# Altium PCB pi_power_pcb.PcbDoc
Units mm, origin at the board's own origin, x right, y up, seen from the top; angles counter-clockwise.
Board outline 83.67 x 56.06 mm, 2 copper layers (Top Layer, GND pour); 18 components, 15 nets, 67 pads, 7 vias.
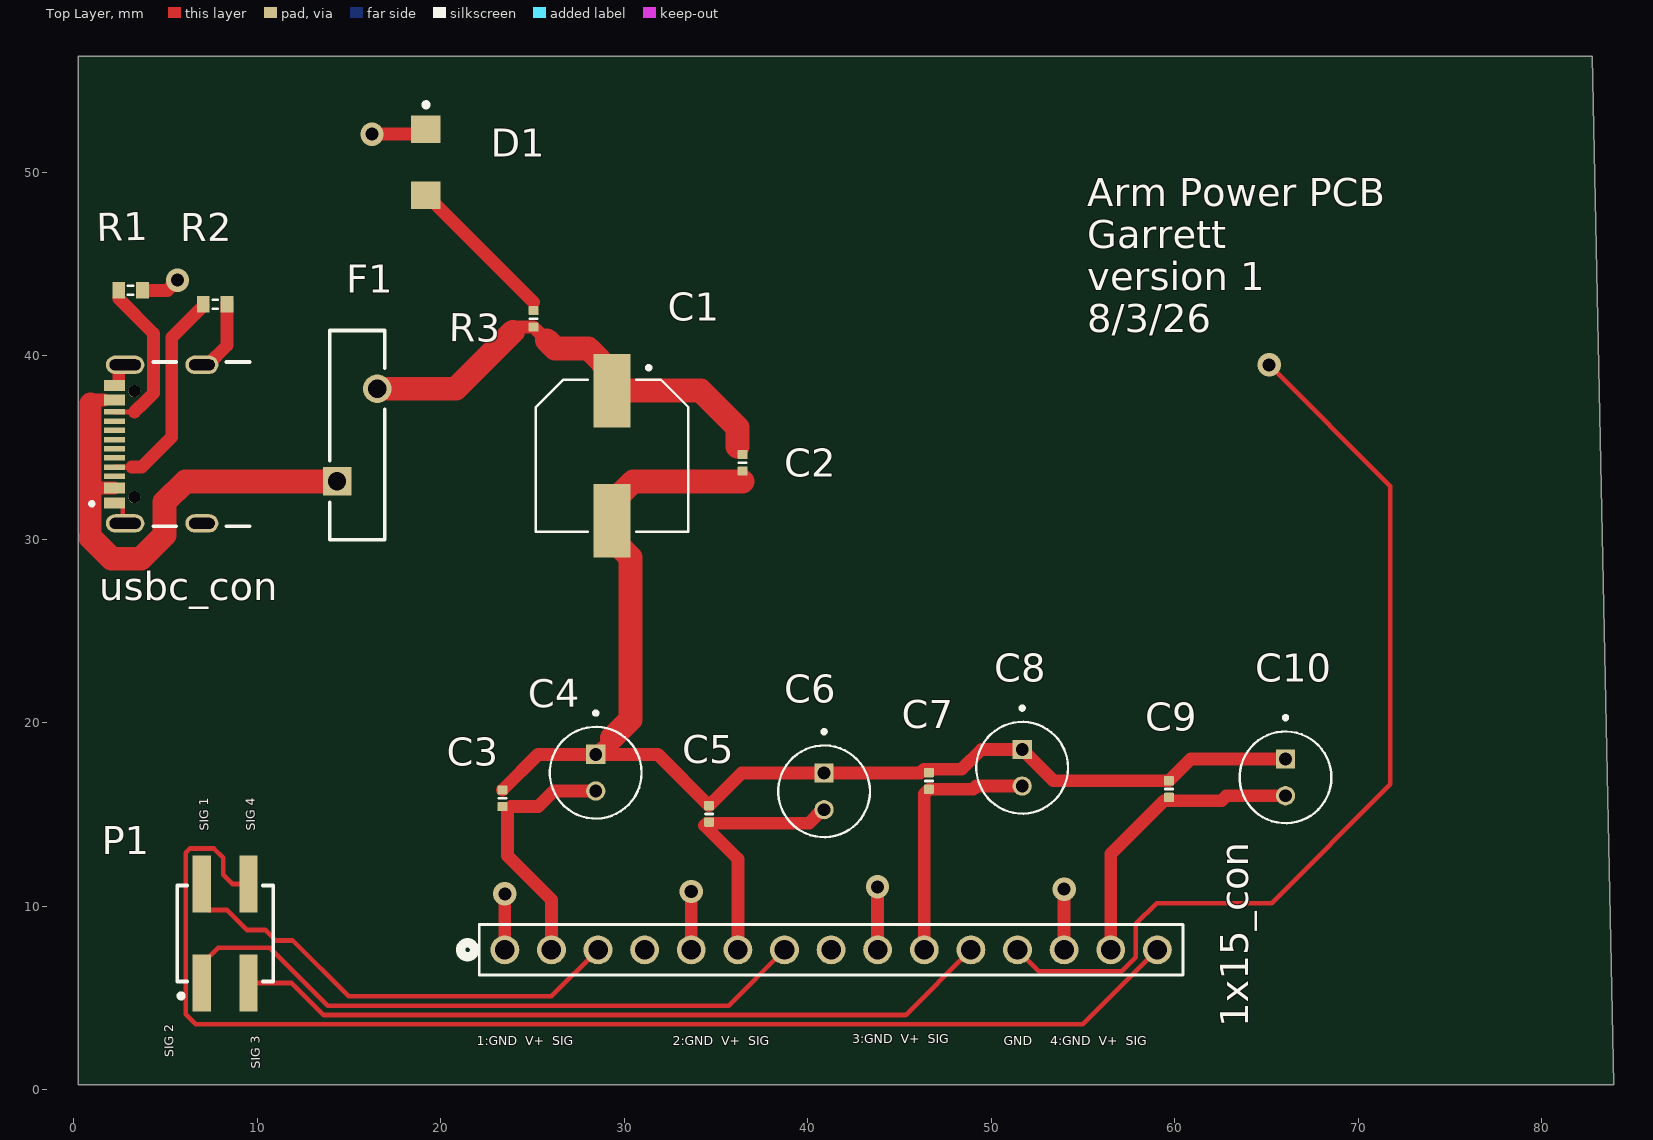
[diagram p0: Top Layer view]
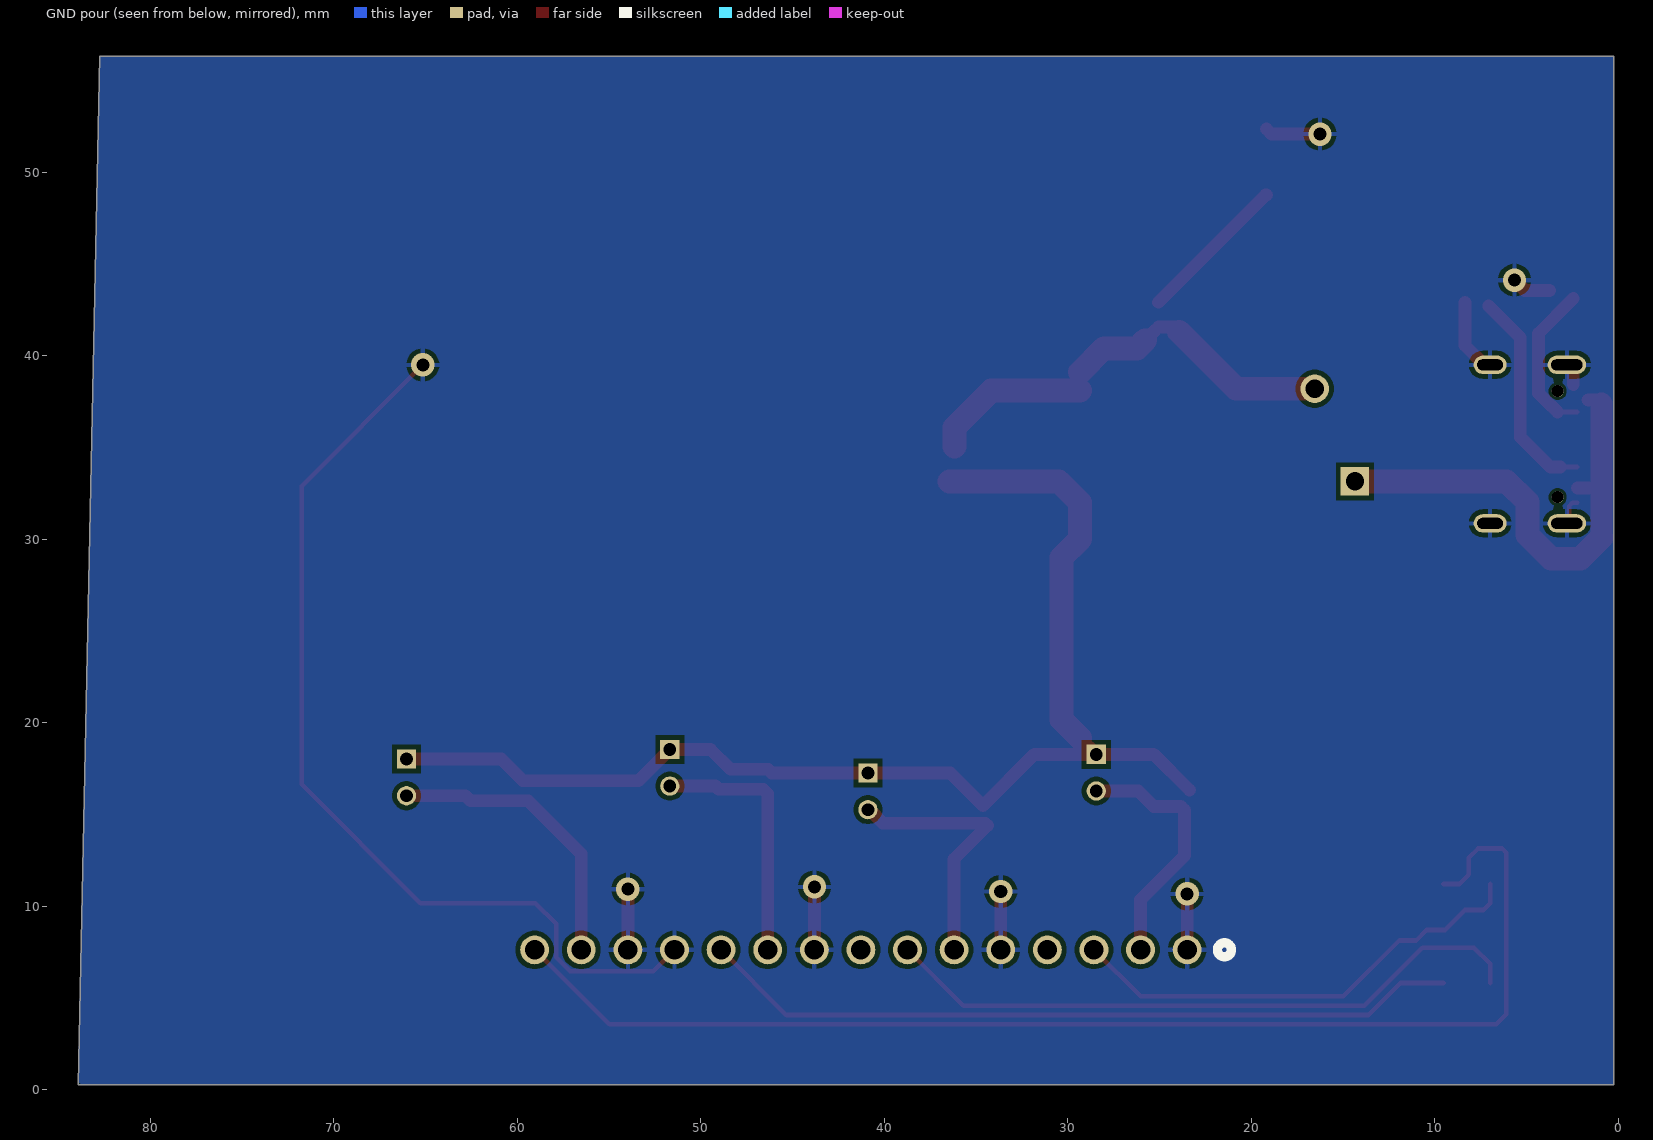
[diagram p1: GND pour view, seen from below]
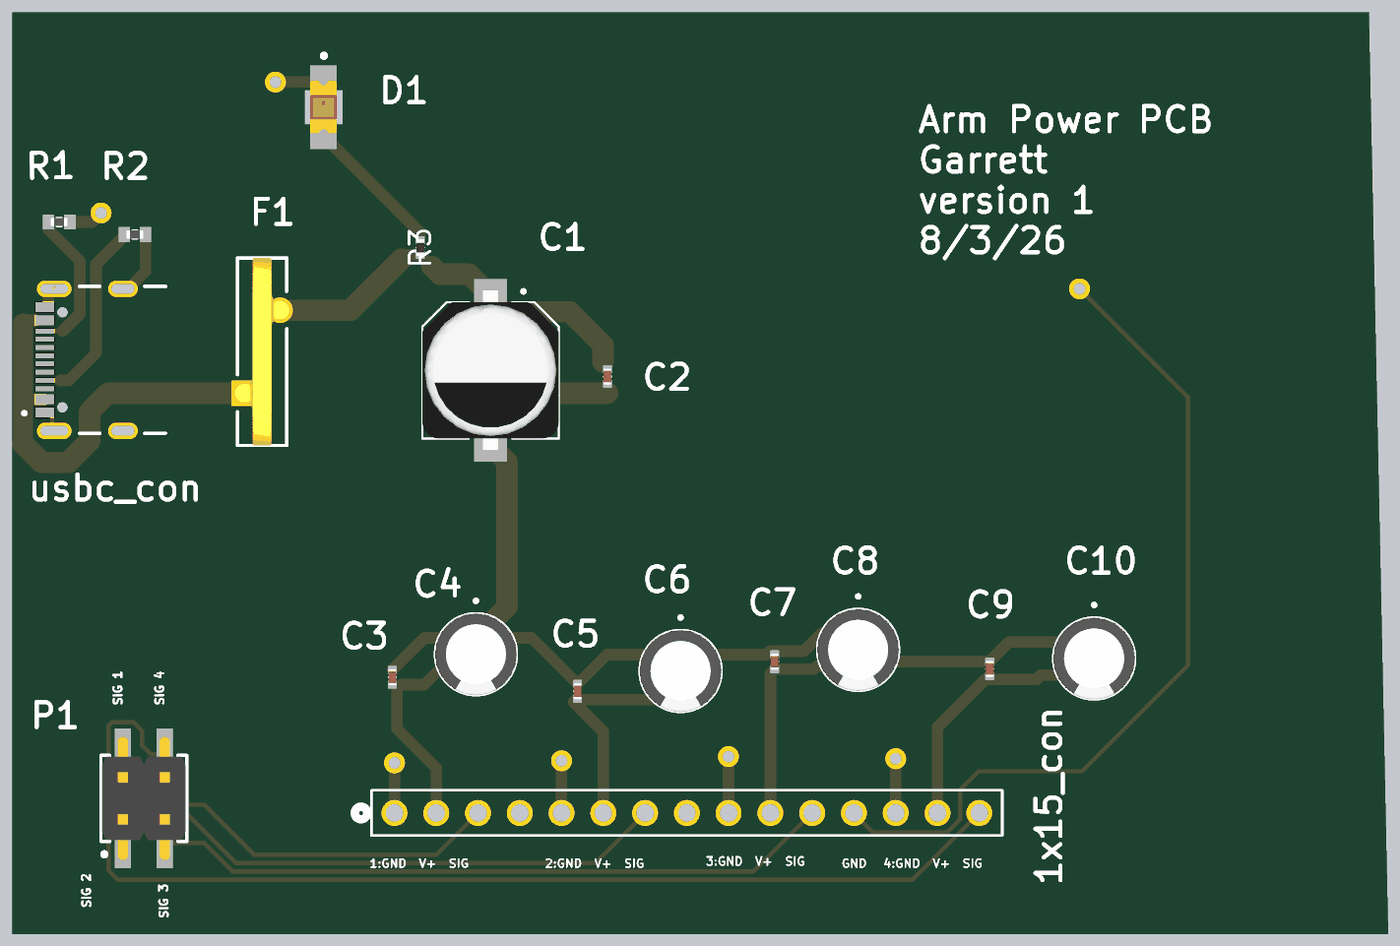
[diagram p2: 3D render of the assembled board from above, using the file's embedded part models]

## Layer stack, top to bottom
Top Solder: solder mask 0.0102, Solder Resist, Dk 3.5
Top Layer: signal copper 0.0356
Dielectric 1: dielectric 0.32, FR-4, Dk 4.8
GND pour: signal copper 0.0356
Bottom Solder: solder mask 0.0102, Solder Resist, Dk 3.5

## Board outline
0.254,0.254 83.922,0.254 82.746,56.31 0.254,56.31

## Design rules (kind name [scope] priority, off if disabled: settings)
Clearance usb_conn_clearance [InComponent('usbc_con')] p1: gap=0.15 ignorepadtopadclearanceinfootprint=FALSE
Clearance [All] p2: gap=0.254 ignorepadtopadclearanceinfootprint=FALSE
MinimumSolderMaskSliver usb_conn_1 [InComponent('usbc_con')] p1: minsoldermaskwidth=0.1
MinimumSolderMaskSliver usb_conn [All] p2 off: minsoldermaskwidth=0.1
MinimumSolderMaskSliver [All] p3: minsoldermaskwidth=0.254
PolygonConnect [All] p1: connectstyle=Relief reliefconductorwidth=0.254 reliefentries=4 polygonreliefangle="90 Angle" airgapwidth=0.254
RoutingVias [All] p1: holewidth=0.711 width=1.27 viastyle="Through Hole" minholewidth=0.711 minwidth=1.27 maxholewidth=0.711 maxwidth=1.27
SilkToSolderMaskClearance smd_capacitors [InComponent('C2') Or InComponent('C3') Or InComponent('C5') Or InComponent('C7') Or InComponent('C9') Or InComponent('R1')Or InComponent('R2') Or InComponent('R3') Or InComponent('P1')] p1: minsilkscreentomaskgap=0.05 clearancetoexposedcopper=TRUE
SilkToSolderMaskClearance [IsPad] p2: minsilkscreentomaskgap=0.254 clearancetoexposedcopper=TRUE
SolderMaskExpansion [All] p1: expansion=0 istentingtop=FALSE
SupplyNets "Schematic Supply Nets" [InNet('GND')] p1: voltage=0.000
Width servo_power_rule [InNetClass('servo_voltage')] p1: maxlimit=0.8 minlimit=0.5 preferedwidth=0.7
Width "main power rule" [InNetClass('main_power')] p2: maxlimit=1.4 minlimit=0.254 preferedwidth=1
Width [All] p3: maxlimit=0.254 minlimit=0.254 preferedwidth=0.254
28 further rules are at their usual default settings.

## Classes and differential pairs
net class servo_voltage: SERVO1v+ servo2v+ Servo3v+ servo4v+
net class main_power: GND NetC1_1 NetC1_2 NetD1_2 NetF1_1 NetR1_2 NetR2_2
component class main_schematic: 1x15_con C1 C3 C4 C5 C6 C7 C8 C9 C10 F1 P1 R1 R2 R3

## Components (designator, comment, footprint, x,y, rotation, side; value= is the part's Value field where it differs from the comment)
1x15_con "22284150" CONN_SD-42375-001_M240_15_MOL 23.495,7.62 r180 top (schematic designator 1x20_con)
C1 "EEEHD1A221AP" CAP_EEEHD1A221AP 29.337,34.544 r270 top locked value=220µF
C2 "Capacitor 100nF +/-20% 50V 0402" CAPC0402(1005)60_L 36.449,34.163 r270 top value=100nF
C3 "Capacitor 100nF +/-20% 50V 0402" CAPC0402(1005)60_L 23.368,15.875 r270 top value=100nF
C4 "ECEA1CKS220" CAPPRD200W45D500H500 28.448,17.272 r270 top value=22µF
C5 "Capacitor 100nF +/-20% 50V 0402" CAPC0402(1005)60_L 34.627,15.025 r270 top value=100nF
C6 "ECEA1CKS220" CAPPRD200W45D500H500 40.894,16.256 r270 top value=22µF
C7 "Capacitor 100nF +/-20% 50V 0402" CAPC0402(1005)60_L 46.609,16.822 r270 top value=100nF
C8 "ECEA1CKS220" CAPPRD200W45D500H500 51.689,17.542 r270 top value=22µF
C9 "Capacitor 100nF +/-20% 50V 0402" CAPC0402(1005)60_L 59.69,16.383 r270 top value=100nF
C10 "ECEA1CKS220" CAPPRD200W45D500H500 66.04,17.018 r270 top value=22µF
D1 "LTST-C230EKT" FP-LTST-C230EKT-MFG 19.177,50.546 r270 top
F1 "RUEF300" FP-RUEF300-MFG 15.446,35.672 r90 top value=0.02-0.08Ω
P1 "61030421121" 61030421121 8.255,8.509 r0 top
R1 "RC0402FR-135K1L" RESC1005X40 3.105,43.561 r180 top value=5.1k
R2 "RC0402FR-135K1L" RESC1005X40 7.712,42.799 r180 top value=5.1k
R3 "2D2KR2J" RESC0402(1005)_L 25.064,42.005 r90 top value=2.2k
usbc_con "USB4105-GF-A" GCT_USB4105-GF-A 6.985,35.179 r90 top locked

## Footprints (in the part's own frame and the unit in brackets; to place one, negate y for a bottom-side part, rotate by r counter-clockwise, add the part's x,y. Pads: shape width x height; smd on the part's side, far side on the other; paste and mask are expansions set on the pad)
61030421121 [mm] "Pin Header, pitch 2.54 mm, SMD, Vertical, dual row, 4p"
  rect 1x3.1 smd: 1(-1.27,-2.7) 2(-1.27,2.7) 3(1.27,-2.7) 4(1.27,2.7)
  silkscreen extent -2.62,-3.52 2.62,2.62, body extent -2.54,-3.75 2.54,3.75, height 9.62
CAP_EEEHD1A221AP [mm]
  rect 4x2 smd: 1(-3.55,0) 2(3.55,0)
  silkscreen extent -4.9,-4.15 4.15,4.15, body extent -4.85,-4.15 4.85,4.15, height 10.2
CAPC0402(1005)60_L [mm] "Chip Capacitor, Body 1.0x0.5mm, Height 0.6mm, IPC High Density"
  rrect25% 0.5x0.55 smd: 1(-0.45,0) 2(0.45,0)
  silkscreen extent 0,-0.2 0,0.2, body extent -0.5,-0.25 0.5,0.25, height 0.6
CAPPRD200W45D500H500 [mm]
  round 1.05 hole 0.7: N(1,0)
  rect 1.05x1.05 hole 0.7: P(-1,0)
  silkscreen extent -3.35,-2.5 2.5,2.5, body extent -2.5,-2.5 2.5,2.5, height 5
CONN_SD-42375-001_M240_15_MOL [mil]
  round 62 hole 42: 1(0,0) 2(-100,0) 3(-200,0) 4(-300,0) 5(-400,0) 6(-500,0) 7(-600,0) 8(-700,0) 9(-800,0) 10(-900,0) 11(-1000,0) 12(-1100,0) 13(-1200,0) 14(-1300,0) 15(-1400,0)
  silkscreen extent -1455,-54 95,54
FP-LTST-C230EKT-MFG [mm]
  rect 1.5x1.6 smd paste+0 mask+0: 1(-1.8,0) 2(1.8,0)
  silkscreen extent -3.25,-0.1 -3,0.15, body extent -2.65,-0.95 2.65,0.95, height 0.25
FP-RUEF300-MFG [mm]
  rect 1.55x1.55 hole 1 paste-2539.97 mask+0: 1(-2.525,1.095)
  round 1.55 hole 1 paste-2539.97 mask+0: 2(2.525,-1.095)
  silkscreen extent -5.7,-1.5 5.7,1.5, body extent -5.8,-1.97 5.8,1.97, height 0.25
GCT_USB4105-GF-A [mm]
  rect 0.6x1.15 smd mask+0.05: A1_B12(-3.2,4.755) A4_B9(-2.4,4.755) B1_A12(3.2,4.755) B4_A9(2.4,4.755)
  rect 0.3x1.15 smd mask+0.05: A5(-1.25,4.755) A6(-0.25,4.755) A7(0.25,4.755) A8(1.25,4.755) B5(1.75,4.755) B6(0.75,4.755) B7(-0.75,4.755) B8(-1.75,4.755)
  oval 1x2.1 hole 0.6 slot 1.7 at 90 deg: SH1(-4.32,4.18) SH2(4.32,4.18)
  oval 1x1.8 hole 0.6 slot 1.4 at 90 deg: SH3(-4.32,0) SH4(4.32,0)
  round 0.65 hole 0.65 unplated: ""(-2.89,3.68) ""(2.89,3.68)
  silkscreen extent -4.47,-2.6 4.47,6.1
RESC0402(1005)_L [mm] "Chip Resistor, Body 1.0x0.5mm, IPC High Density"
  rrect25% 0.5x0.55 smd: 1(-0.45,0) 2(0.45,0)
  silkscreen extent 0,-0.2 0,0.2, body extent -0.5,-0.25 0.5,0.25, height 0.3
RESC1005X40 [mm]
  rect 0.7x0.9 smd: 1(-0.65,0) 2(0.65,0)
  silkscreen extent -0.15,-0.25 0.15,0.25, body extent -0.5,-0.25 0.5,0.25, height 0.4

## Part data
1x15_con: library part CMP-002-00073-1, "2.54mm Pitch KKÂ® Header, Breakaway, Vertical, 15 Circuits, Tin (Sn) Plating, Mating Pin Length 6.09mm", Case/Package=None, Check_prices=https://www.snapeda.com/parts/22284150/Molex/view-part/?ref=eda, Component Type=Standard, Design Item ID=22284150, MF=Molex, MP=22284150, Pins=15, SnapEDA_Link=https://www.snapeda.com/parts/22284150/Molex/view-part/?ref=snap, Source=22284150.SchLib
C1: library part CMP-001-00084-1, "Tá»¥ Ä‘iá»‡n phÃ¢n nhÃ´m 220ÂµF 10V hÆ°á»›ng tÃ¢m, cÃ³ thá»ƒ - SMD 5000 giá» á»Ÿ 105Â°C", Case/Package="RADIAL-2 Panasonic", Check_prices=https://www.snapeda.com/parts/EEEHD1A221AP/Panasonic/view-part/?ref=eda, Component Type=Standard, Design Item ID=EEEHD1A221AP, MF=Panasonic, MP=EEEHD1A221AP, Pins=2, SnapEDA_Link=https://www.snapeda.com/parts/EEEHD1A221AP/Panasonic/view-part/?ref=snap, Source=EEEHD1A221AP.SchLib
C2 C3 C5 C7 C9: library part CMP-001-00067-3, "Chip Capacitor, 100nF +/-20%, 50V, 0402, Thickness 0.6 mm", Case/Package=0402, Max Operating Temperature=85°C, Min Operating Temperature=-55°C, Tolerance=10%, Voltage Rating=50V, Mounting Technology=SMT, Pins=2
C4 C6 C8 C10: library part CMP-001-00083-1, "Capacitor; Aluminum Electrolytic; Cap 22uF; Vol-Rtg 16V; Radial; Ks; Height 5mm", Case/Package="RADIAL-2 Panasonic", Availability="In Stock", Check_prices=https://www.snapeda.com/parts/ECE-A1CKS220/Panasonic/view-part/2301577/?ref=eda, Component Type=Standard, Design Item ID=ECEA1CKS220, MF=Panasonic, MP=ECE-A1CKS220, Pins=2, Price=None, Purchase-URL=https://pricing.snapeda.com/search/part/ECE-A1CKS220/?ref=eda, SnapEDA_Link=https://www.snapeda.com/parts/ECE-A1CKS220/Panasonic/view-part/2301577/?ref=snap, Source=ECEA1CKS220.SchLib
D1: library part CMP-22017-000030-1, "LED RED CLEAR CHIP SMD", Case Code (Imperial)=1206, Case Code (Metric)=3216, Color=Red, Forward Current=30mA, Forward Voltage=2V, Lens Color=Colorless, Max Operating Temperature=85°C, Min Operating Temperature=-55°C, Package Quantity=1, Power Dissipation=100mW, Reverse Voltage=5V, Test Current=10mA, Case/Package=1206, Depth=1.6mm, Dominant Wavelength=621nm, Height=1.1mm, Illumination Color=Red, Lead Free="Lead Free", Length=3.2mm, Lens Style=Diffused, Lens Transparency=Clear, Luminous Intensity=6mcd, Mount="Surface Mount", Number of Elements=1, Number of LEDs=1, Number of Pins=2, Packaging="Tape and Reel", Power Rating=100mW, Radiation Hardening=No, Viewing Angle=130°, Wavelength=630nm, Width=1.6mm
F1: library part CMP-08606-000026-1, "PTC RESET FUSE 30V 3A RADIAL", Ambient Temperature Range High=+85°C, Ambient Temperature Range Low=-40°C, Current Rating=100A, Hold Current=3A, Manufacturer=Littelfuse, Package=0, Resistance=0.02-0.08Ω, Temperature="-40°C to +85°C", Trip Current=6A, Voltage Rating=30V, Automotive=No, Category=Fuse, ComponentLink2Description=Datasheet, ComponentLink2URL=https://www.littelfuse.com/~/media/electronics/datasheets/resettable_ptcs/littelfuse_ptc_radial_leaded_ruef_datasheet.pdf.pdf, Device Class L1="Circuit Protection", Device Class L2="PTC Resettable Fuses", Device Class L3=unset, Digikey Description="PTC RESET FUSE 30V 3A RADIAL", Height=16.5mm, Lead Free=Yes, Manufacturer Part Number=RUEF300, Octopart=https://octopart.com/ruef300-littelfuse-74215783, RoHS=TRUE, Temperature Range High=+85°C, Temperature Range Low=-40°C, Trip Time=10.8s
P1: library part CMP-1502-01050-4, "SMT Vertical Pin Header WR-PHD, Pitch 2.54 mm, Dual Row, 4 pins", Color=Black, Contact Resistance=20mΩ, Current Rating=3A, Operating Supply Voltage=250V, Connector Type="Male Pin", Contact Material=Copper, Contact Mating Length=5.9944mm, Contact Plating=Gold, Gender=Male, Lead Pitch=2.54mm, Mount="Surface Mount", Number of Contacts=4, Number of Pins=4, Number of Positions=4, Number of Rows=2, Orientation=Vertical, Packaging="Tape and Reel", Pitch=2.54mm, RoHS=Compliant, Row Spacing=2.54mm, Termination=Solder
R1 R2: library part CMP-009-00177-1, "Res Thick Film 0402 5.1K Ohm 1% 1/16W Â±100ppm/Â°C Molded SMD SMD Paper T/R", Case/Package="SMD-2 Yageo", Check_prices=https://www.snapeda.com/parts/RC0402FR-135K1L/Yageo/view-part/?ref=eda, Component Type=Standard, Design Item ID=RC0402FR-135K1L, MF=Yageo, MP=RC0402FR-135K1L, Pins=2, SnapEDA_Link=https://www.snapeda.com/parts/RC0402FR-135K1L/Yageo/view-part/?ref=snap, Source=RC0402FR-135K1L.SchLib
R3: library part CMP-009-00087-2, "2K2 0.063W 5% 0402 (1005 Metric)  SMD", Case/Package=0402, Power=63mW, Tolerance=5%, Mounting Technology=SMT, Pins=2
usbc_con: library part CMP-002-00072-1, Case/Package=None, Availability=Unavailable, Component Type=Standard, Design Item ID=USB4105-GF-A, MF="{'manufacturer': u'GCT'}", MP=USB4105-GF-A, Pins=16, Price=None, Source=USB4105-GF-A.SchLib

## Via types
v1: diameter 1.27, hole 0.711, Top Layer to GND pour, 7 vias

## Nets (pads, with @x,y where several pads share a name; then routed paths per layer and width w, separated by ;. In a path a pad name is that pad's centre, name@x,y a point inside that pad or via, vN(x,y) a via of type N, cw(c..) or ccw(c..) an arc to the next point about the centre after c; other vN are vias at no path point)
GND: 1x15_con.1 1x15_con.5 1x15_con.9 1x15_con.12 1x15_con.13 D1.1 R1.1 R2.1 usbc_con.A1_B12 usbc_con.B1_A12 usbc_con.SH1 usbc_con.SH2 usbc_con.SH3 usbc_con.SH4 | length 77.6
  Top Layer w0.254: usbc_con.A1_B12 2.505,31.979 2.678,31.806 2.678,30.986 usbc_con.SH1 ; usbc_con.SH3@6.442,31.204 6.787,30.859 usbc_con.SH3 ; v1(33.655,10.795) v1@33.655,10.922 ; 1x15_con.12 52.603,6.452 57.125,6.452 57.887,7.214 57.887,9.033 59.014,10.16 65.278,10.16 71.755,16.637 71.755,32.893 v1(65.151,39.497)
  Top Layer w0.7: usbc_con.B1_A12@2.455,38.429 2.455,39.36 2.594,39.499 usbc_con.SH2 ; R1.1 3.755,43.559 5.104,43.559 v1(5.656,44.111) ; usbc_con.SH4 7.304,39.499 8.362,40.557 R2.1 R2.1@8.362,42.899 ; v1(16.256,52.07) 18.901,52.07 D1.1 ; 1x15_con.1 v1(23.495,10.668) ; 1x15_con.5 v1(33.655,10.795) ; v1(43.804,11.049) 43.81,11.044 43.81,7.625 1x15_con.9 ; 1x15_con.13 v1(53.975,10.922)
NetC1_1: C1.1 C2.1 F1.2 R3.1 | length 23.8
  Top Layer w0.254: C1.1 C1.1@29.337,38.344
  Top Layer w0.7: 23.934,41.555 R3.1 ; R3.1@25.212,41.407 25.781,40.839
  Top Layer w1.3: F1.2 20.825,38.197 23.934,41.306 ; 25.781,40.839 26.234,40.386 28.045,40.386 C1.1@29.337,39.094 ; C1.1 34.169,38.094 36.174,36.089 36.174,35.052
NetC1_2: C1.2 C2.2 C3.1 C4.P C5.1 C6.P C7.1 C8.P C9.1 C10.P | length 69.6
  Top Layer w0.7: C3.1 25.315,18.272 C4.P ; 29.337,19.161 C4.P ; C10.P 60.875,18.018 C9.1 53.398,16.833 C8.P 49.465,18.542 48.383,17.46 46.334,17.46 46.13,17.256 C6.P 36.408,17.256 C5.1 31.83,18.272 C4.P
  Top Layer w1.3: 29.337,19.161 30.337,20.161 30.337,28.994 29.337,29.994 C1.2 29.337,31.994 30.49,33.147 36.449,33.147
NetD1_2: D1.2 R3.2 | length 8.3
  Top Layer w0.7: D1.2 19.227,48.746 25.064,42.909
NetF1_1: F1.1 usbc_con.A4_B9 usbc_con.B4_A9 | length 26
  Top Layer w0.7: 0.905,37.39 1.094,37.579 usbc_con.B4_A9@1.655,37.579 ; 1.124,32.779 usbc_con.A4_B9
  Top Layer w1.2: 0.905,30.083 0.905,37.39
  Top Layer w1.3: 0.905,30.083 2.054,28.934 3.661,28.934 4.953,30.226 4.953,32.015 6.085,33.147 F1.1
NetR1_2: R1.2 usbc_con.B5 | length 8.7
  Top Layer w0.254: usbc_con.B5 3.305,36.929 3.155,36.929 ; 3.62,37.244 3.647,37.244
  Top Layer w0.7: 2.455,43.111 4.355,41.211 4.355,37.952 3.647,37.244 3.62,37.244 3.305,36.929
NetR2_2: R2.2 usbc_con.A5 | length 11.7
  Top Layer w0.254: usbc_con.A5 3.162,33.929 ; R2.2@7.062,42.699 R2.2
  Top Layer w0.7: 3.162,33.929 3.705,33.929 5.347,35.571 5.347,40.984 R2.2@7.062,42.699
servo1_sig: 1x15_con.3 P1.2 | length 25.8
  Top Layer w0.254: P1.2 6.985,10.159 7.358,9.786 8.359,9.786 9.442,8.703 10.43,8.703 11.005,8.128 11.938,8.128 14.986,5.08 26.035,5.08 1x15_con.3
SERVO1v+: 1x15_con.2 C3.2 C4.N | length 13.8
  Top Layer w0.7: 1x15_con.2 26.035,10.351 23.643,12.743 23.643,15.238 23.831,15.425 25.315,15.425 26.162,16.272 C4.N
servo2_sig: 1x15_con.7 P1.1 | length 35.7
  Top Layer w0.254: P1.1 6.985,6.859 7.866,7.74 10.675,7.74 13.843,4.572 35.687,4.572 1x15_con.7
servo2v+: 1x15_con.6 C5.2 C6.N | length 14.4
  Top Layer w0.7: 1x15_con.6 36.195,12.573 34.38,14.388 34.514,14.521 40.064,14.521 40.799,15.256 C6.N
servo3_sig: 1x15_con.11 P1.3 | length 41.6
  Top Layer w0.254: P1.3 11.888,5.809 13.633,4.064 45.339,4.064 1x15_con.11
Servo3v+: 1x15_con.10 C7.2 C8.N | length 14
  Top Layer w0.7: 1x15_con.10 46.355,16.118 C7.2 49.017,16.372 49.187,16.542 C8.N
servo4_sig: 1x15_con.15 P1.4 | length 68.5
  Top Layer w0.254: P1.4 8.644,11.209 8.143,11.71 8.143,12.639 7.643,13.14 6.327,13.14 6.104,12.917 6.104,4.101 6.649,3.556 54.991,3.556 1x15_con.15
servo4v+: 1x15_con.14 C9.2 C10.N | length 16.1
  Top Layer w0.7: 1x15_con.14 56.515,12.846 59.415,15.746 62.544,15.746 62.816,16.018 C10.N
pads on no net: 1x15_con.4 1x15_con.8 usbc_con. usbc_con.A6 usbc_con.A7 usbc_con.A8 usbc_con.B6 usbc_con.B7 usbc_con.B8

## Polygon pours and split planes (outlines as drawn)
GND on GND pour "GND" (solid, pour order 0): 0.254,0.254 83.922,0.254 82.746,56.31 0.254,56.31

## Silkscreen, mask and mechanical layers (free items; w line width, h text height)
Top Overlay:
  text "Arm Power PCB / Garrett / version 1 / 8/3/26" at 55.245,41.275 h1.52
  text "SIG 1" at 7.366,14.097 h0.5 r90.86
  text "SIG 4" at 9.906,14.097 h0.5 r90.86
  text "3:GND  V+  SIG" at 42.418,2.54 h0.5
  text "1:GND  V+  SIG" at 21.971,2.413 h0.5
  text "2:GND  V+  SIG" at 32.639,2.413 h0.5
  text "GND" at 50.673,2.413 h0.5
  text "4:GND  V+  SIG" at 53.213,2.413 h0.5
  text "SIG 2" at 5.461,1.778 h0.5 r90.86
  text "SIG 3" at 10.16,1.143 h0.5 r90.86

## Text inside footprints (layer, text, board x,y; h text height)
usbc_con: Mechanical 13 "PCB EDGE" at 9.485,40.579 h0.41 r90